# EAGLE board erfid (EAGLE 7.6.0)
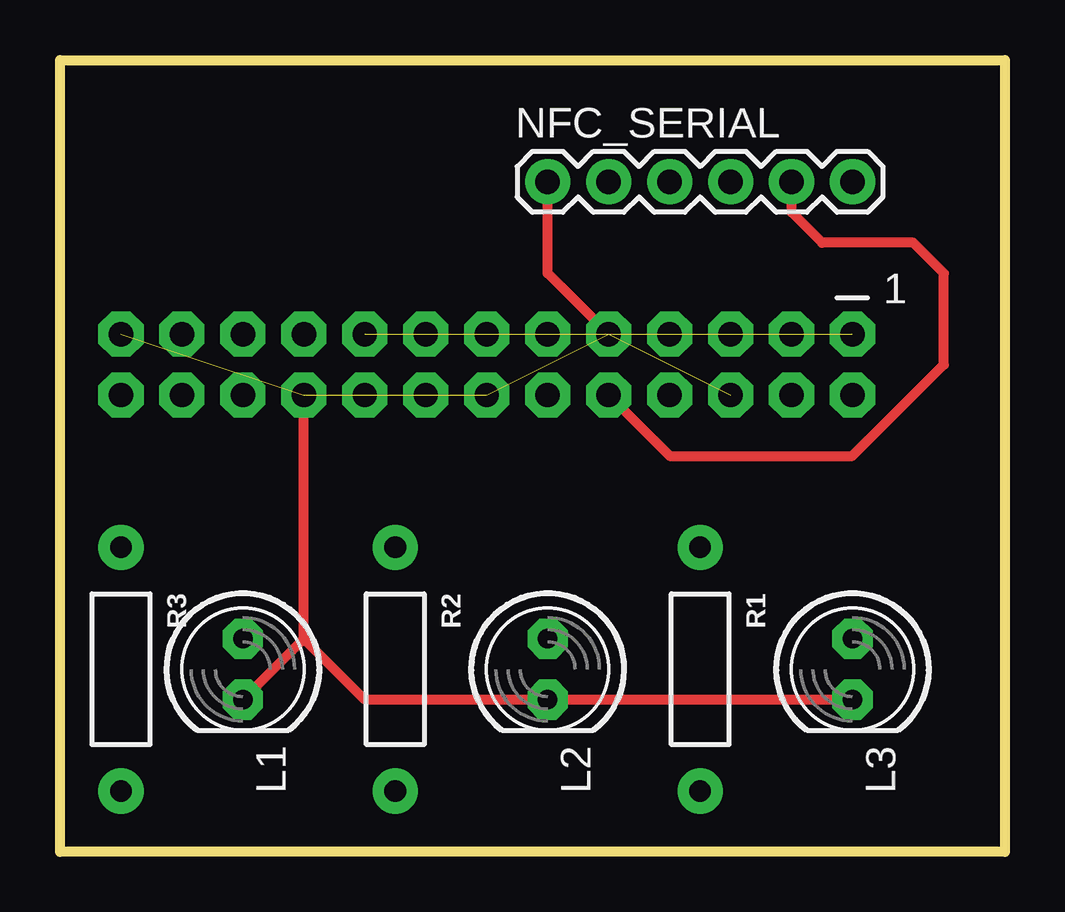
[diagram p0: board, top side]
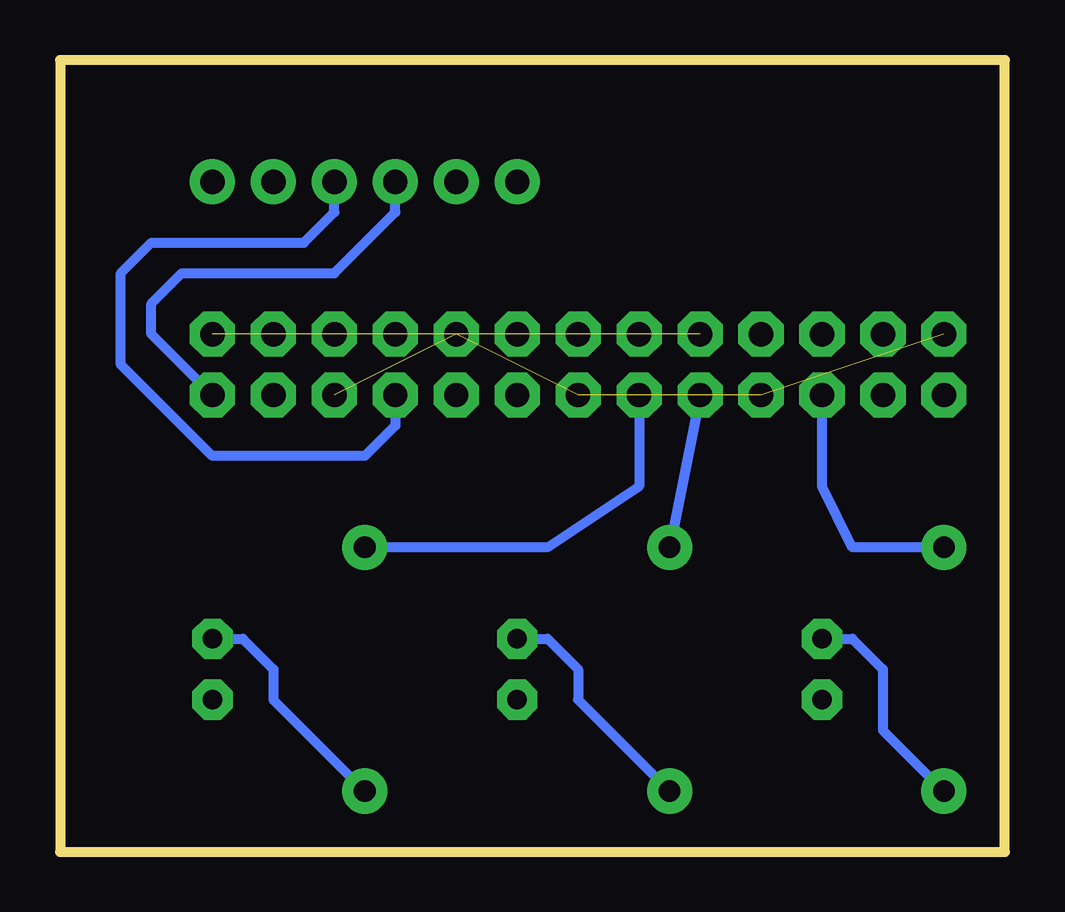
[diagram p1: board, bottom side, seen from below]

Size 39.37 x 33.02 mm. Coordinates in mm from the lower left corner, seen from the top.
Outline: 0,0 0,33.02 39.37,33.02 39.37,0 0,0
Copper layers (1*16): Top 0.035mm / dielectric 1.5mm / Bottom 0.035mm
Design rules "default": minimum track width 10mil, minimum drill 24mil, track to track 8mil, track to pad 8mil, pad to pad 8mil, via to via 8mil, smd to smd 8mil, copper to edge 40mil, drill to drill 8mil, minimum pad ring 10mil, minimum via ring 8mil, stop-mask expansion 4mil, vias tented up to drill 0mil, thermal gap 10mil

## Footprints (pad centres in the part's own frame; a part is rotated, then mirrored left to right if it is on the bottom)
2X13-SHROUDED = drill 1.016 pad 1.88 octagon: 1 -1.27,15.24; 2 1.27,15.24; 3 -1.27,12.7; 4 1.27,12.7; 5 -1.27,10.16; 6 1.27,10.16; 7 -1.27,7.62; 8 1.27,7.62; 9 -1.27,5.08; 10 1.27,5.08; 11 -1.27,2.54; 12 1.27,2.54; 13 -1.27,0; 14 1.27,0; 15 -1.27,-2.54; 16 1.27,-2.54; 17 -1.27,-5.08; 18 1.27,-5.08; 19 -1.27,-7.62; 20 1.27,-7.62; 21 -1.27,-10.16; 22 1.27,-10.16; 23 -1.27,-12.7; 24 1.27,-12.7; 25 -1.27,-15.24; 26 1.27,-15.24
LED5MM = drill 0.813 pad 1.676 octagon: A -1.27,0; K 1.27,0
1X06 = drill 1.016 pad 1.88: 1 0,0; 2 2.54,0; 3 5.08,0; 4 7.62,0; 5 10.16,0; 6 12.7,0
AXIAL-0.4 = drill 0.9 pad 1.88: P$1 -5.08,0; P$2 5.08,0

## Placement (x,y rotation side)
JP1  RASPBERRYPI-GPIOPTH  [2X13-SHROUDED]  17.78,20.32 270 top
L1  [LED5MM]  7.62,7.62 270 top
L2  [LED5MM]  20.32,7.62 270 top
L3  [LED5MM]  33.02,7.62 270 top
NFC_SERIAL  [1X06]  20.32,27.94 0 top
R1  [AXIAL-0.4]  26.67,7.62 270 top
R2  [AXIAL-0.4]  13.97,7.62 270 top
R3  [AXIAL-0.4]  2.54,7.62 270 top

## Library data of the parts
JP1 = SparkFun-Boards; DIST: sparkfun; DIST_ID: PRT-11490
L1-L3 = adafruit
NFC_SERIAL = SparkFun-Connectors; PROD_ID: CONN-08437
R1-R3 = SparkFun-Resistors

## Nets
3.3V: JP1.1 JP1.17
5V: JP1.4
FAIL_LED_LINE: JP1.18 R2.P$1
GND: JP1.6 JP1.9 JP1.14 JP1.20 JP1.25 L1.K L2.K L3.K NFC_SERIAL.1
N$1: L2.A R2.P$2
N$2: L3.A R1.P$2
N$3: L1.A R3.P$2
NOT_SETUP_LINE: JP1.22 R3.P$1
RXD: JP1.10 NFC_SERIAL.5
SUCCESS_LED_LINE: JP1.16 R1.P$1
TXD: JP1.8 NFC_SERIAL.4
VCC: JP1.2 NFC_SERIAL.3

## Tracks (layer width: path | path; a pad name or v marks a point on that pad's centre or on a via)
3.3V  (1 unrouted)
FAIL_LED_LINE
  Bottom 0.406: JP1.18 R2.P$1
GND  (4 unrouted)
  Top 0.406: L3.K L2.K 12.7,6.35 10.16,8.89 | L1.K 10.16,8.89 | 10.16,8.89 JP1.20 | JP1.9 20.32,24.13 NFC_SERIAL.1
N$1
  Bottom 0.406: L2.A 19.05,8.89 17.78,7.62 17.78,6.35 R2.P$2
N$2
  Bottom 0.406: L3.A 31.75,8.89 30.48,7.62 30.48,6.35 R1.P$2
N$3
  Bottom 0.406: L1.A 6.35,8.89 5.08,7.62 5.08,5.08 R3.P$2
NOT_SETUP_LINE
  Bottom 0.406: R3.P$1 6.35,12.7 7.62,15.24 JP1.22
RXD
  Top 0.406: JP1.10 25.4,16.51 33.02,16.51 36.83,20.32 36.83,24.13 35.56,25.4 31.75,25.4 30.48,26.67 NFC_SERIAL.5
SUCCESS_LED_LINE
  Bottom 0.406: JP1.16 15.24,15.24 19.05,12.7 R1.P$1
TXD
  Bottom 0.406: JP1.8 25.4,17.78 26.67,16.51 33.02,16.51 36.83,20.32 36.83,24.13 35.56,25.4 29.21,25.4 27.94,26.67 NFC_SERIAL.4
VCC
  Bottom 0.406: JP1.2 35.56,21.59 35.56,22.86 34.29,24.13 27.94,24.13 25.4,26.67 NFC_SERIAL.3